# EAGLE board Control Board (EAGLE 7.7.0)
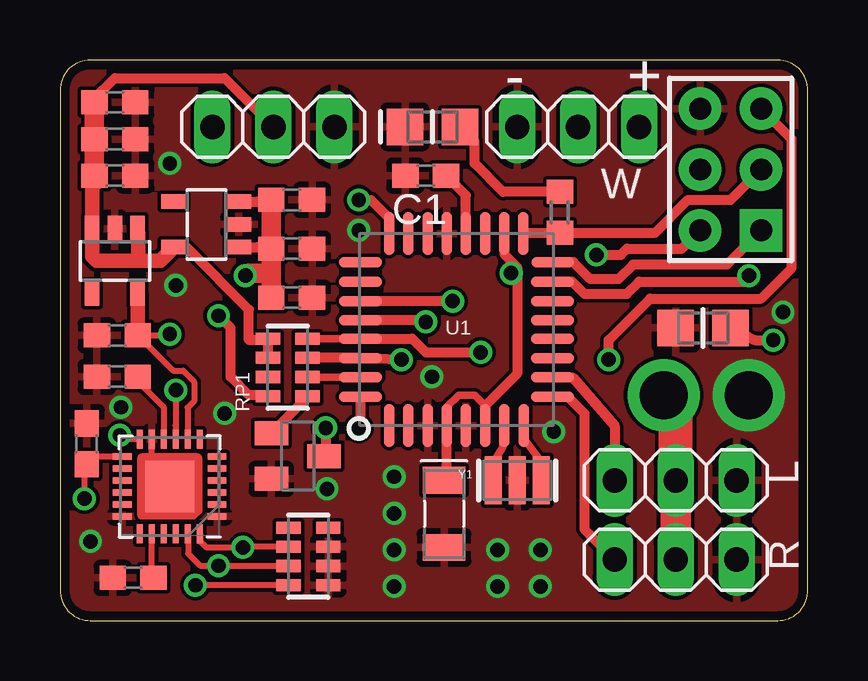
[diagram p0: board, top side]
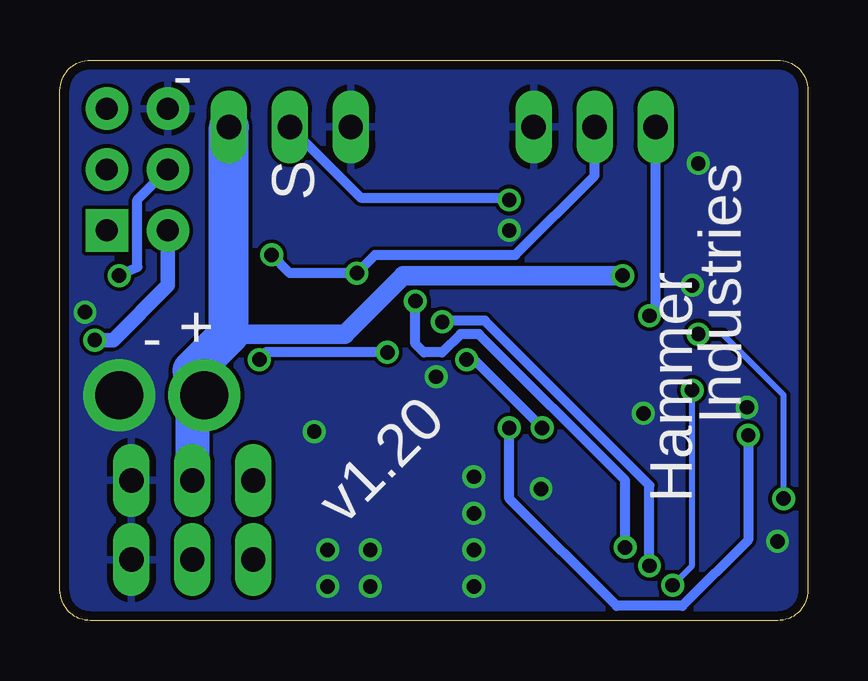
[diagram p1: board, bottom side, seen from below]

Size 31.17 x 23.36 mm. Coordinates in mm from the lower left corner, seen from the top.
Outline: 1.27,0 29.9,0 arc90 31.17,1.27 31.17,22.09 arc90 29.9,23.36 1.27,23.36 arc90 0,22.09 0,1.27 arc90 1.27,0
Copper layers (1*16): Top 0.0356mm / dielectric 1.5011mm / Bottom 0.0356mm
Design rules "oshpark-2layer *": minimum track width 6mil, minimum drill 13mil, track to track 6mil, track to pad 6mil, pad to pad 6mil, via to via 6mil, smd to smd 6mil, copper to edge 15mil, drill to drill 6mil, minimum pad ring 7mil, minimum via ring 7mil, stop-mask expansion 2.5mil, vias tented up to drill 25mil, thermal gap 10mil

## Footprints (pad centres in the part's own frame; a part is rotated, then mirrored left to right if it is on the bottom)
C0603 = smd 1.1 x 1: 1 -0.85,0; 2 0.85,0
TAN-A = smd 1.118 x 1.778: 1 0,0; 2 2.794,0
CAP0805-NP = smd 1.524 x 1.524: 1 0,0; 2 2.286,0
SOT23-5 = smd 0.6 x 1.05: 1 -0.95,-1.35; 2 0,-1.35; 3 0.95,-1.35; 4 0.95,1.35; 5 -0.95,1.35
QFN50P400X400X95-25T265X275N = smd 0.26 x 0.79: 1 -1.25,-1.97; 2 -0.75,-1.97; 3 -0.25,-1.97; 4 0.25,-1.97; 5 0.75,-1.97; 6 1.25,-1.97; 13 1.25,1.97; 14 0.75,1.97; 15 0.25,1.97; 16 -0.25,1.97; 17 -0.75,1.97; 18 -1.25,1.97 | smd 0.79 x 0.26: 7 1.97,-1.25; 8 1.97,-0.75; 9 1.97,-0.25; 10 1.97,0.25; 11 1.97,0.75; 12 1.97,1.25; 19 -1.97,1.25; 20 -1.97,0.75; 21 -1.97,0.25; 22 -1.97,-0.25; 23 -1.97,-0.75; 24 -1.97,-1.25 | smd 2.15 x 2.05: 25 0,0
HEAD3X2 = drill 0.914 pad 1.778 square: 1 0,0 | drill 0.914 pad 1.778: 2 0,2.54; 3 2.54,0; 4 2.54,2.54; 5 5.08,0; 6 5.08,2.54
1X03 = drill 1.016 long: 1 -2.54,0; 2 0,0; 3 2.54,0
LED0805 = smd 1.524 x 1.524: 1 0,0; 2 2.286,0
R0603 = smd 1 x 1.1: 1 -0.85,0; 2 0.85,0
RES4NT = smd 0.508 x 1.016: 1 0,0; 2 0.8,0; 3 1.6,0; 4 2.4,0; 5 2.4,1.651; 6 1.6,1.651; 7 0.8,1.651; 8 0,1.651
SOT23-BEC = smd 1 x 1.4: B -0.95,-1.1; C 0,1.1; E 0.95,-1.1
QFP032 = smd 0.432 x 1.778: 1 0,0; 2 0.8,0; 3 1.599,0; 4 2.399,0; 5 3.199,0; 6 3.998,0; 7 4.798,0; 8 5.598,0; 17 5.588,8.001; 18 4.798,7.997; 19 3.998,7.997; 20 3.199,7.997; 21 2.399,7.997; 22 1.599,7.997; 23 0.799,7.997; 24 0,7.997 | smd 1.778 x 0.432: 9 6.807,1.194; 10 6.807,2.007; 11 6.807,2.794; 12 6.807,3.607; 13 6.807,4.394; 14 6.807,5.182; 15 6.807,5.994; 16 6.816,6.803; 25 -1.194,6.807; 26 -1.194,5.994; 27 -1.194,5.182; 28 -1.194,4.394; 29 -1.194,3.607; 30 -1.194,2.794; 31 -1.194,2.007; 32 -1.194,1.194
RESONATOR = smd 0.7 x 2: 1 -1,0; 2 0,0; 3 1,0

## Placement (x,y rotation side)
C1  [C0603]  15.24,18.54 180 top
C2  4.7uF  [TAN-A]  16,5.84 270 top
C3  0.1uF  [CAP0805-NP]  27.94,12.19 180 top
C4  [C0603]  2.29,18.54 0 top
C5  [C0603]  9.65,15.49 0 top
C6  [C0603]  2.39,10.16 0 top
C7  [C0603]  2.39,11.89 180 top
C8  [C0603]  2.29,21.59 0 top
C9  [C0603]  1.12,7.37 90 top
C10  [C0603]  3.05,1.78 0 top
C11  [C0603]  9.65,17.53 0 top
C13  [C0603]  9.65,13.46 0 top
C14  [C0603]  2.29,20.07 0 top
IC1  TPS70916DBV  [SOT23-5]  6.1,16.51 90 top
IC2  MPU6050  [QFN50P400X400X95-25T265X275N]  4.57,5.59 90 top
IC3  TPS70916DBV  [SOT23-5]  2.29,14.99 180 top
J4  HEAD3X2  [HEAD3X2]  29.21,16.26 90 top
L  [1X03]  25.65,5.84 180 top
LED3  L_AMBER  [LED0805]  14.38,20.57 0 top
R  [1X03]  25.65,2.54 180 top
R1  1K  [R0603]  20.83,17.02 270 top
RP1  1K  [RES4NT]  10.31,9.35 90 top
RP2  4.7K  [RES4NT]  11.18,1.47 90 top
SBUS  [1X03]  8.89,20.57 180 top
T1  [SOT23-BEC]  9.91,6.86 270 top
U1  ATMEGA328  [QFP032]  13.72,8.13 0 top
W  [1X03]  21.59,20.57 0 top
Y1  16MHz  [RESONATOR]  19.05,5.84 0 top

## Library data of the parts
C1 C4-C11 C13 C14 R1 = resistor
C2 C3 LED3 RP1 RP2 U1 = MySMD
IC1 IC3 = tps709xx_10; MF: Texas Instruments; MPN: TPS70916DBVT; OC_FARNELL: 2314371; OC_NEWARK: 69W6893
IC2 = invensense
J4 = MyCON2
L R SBUS W = pinhead
T1 = transistor-neu-to92
Y1 = MySMD2

## Nets
+3V3: C7.1 C9.1 IC2.8 IC2.13 IC3.5
+5V: C2.1 C3.1 C4.1 C8.1 C14.1 IC1.5 IC3.1 IC3.3 J4.2 RP1.5 RP1.6 SBUS.2 U1.4 U1.6 U1.18
A0: U1.23
A1: U1.24 W.2
A2: U1.25
A3: U1.26
A4: IC2.24 RP2.6 U1.27
A5: IC2.23 RP2.7 U1.28
A6: U1.19
A7: U1.22
AREF: C1.1 U1.20
COM: C1.2 C2.2 C3.2 C4.2 C5.2 C6.1 C7.2 C8.2 C9.2 C10.1 C11.2 C13.2 C14.2 IC1.2 IC2.1 IC2.11 IC2.18 IC2.25 IC3.2 J4.6 L.1 LED3.1 R.1 RP2.1 RP2.2 RP2.3 SBUS.1 T1.E U1.3 U1.5 U1.21 W.1 Y1.2
D0/RX: RP1.3 T1.C U1.30
D1/TX: RP1.2 U1.31
D2: IC2.12 U1.32
D3: U1.1
D4: U1.2
D5: R.3 U1.9
D6: L.3 U1.10
D7: U1.11
D8: U1.12
D9: U1.13
D10: U1.14
D11/MOSI: J4.4 U1.15
D12/MISO: J4.1 U1.16
D13/SCK: J4.3 R1.2 U1.17
N$1: U1.8 Y1.3
N$2: U1.7 Y1.1
N$3: IC2.9 RP2.8
N$4: C6.2 IC2.10
N$5: RP1.1 T1.B
N$6: C10.2 IC2.20
N$7: LED3.2 R1.1
RESET: J4.5 RP1.4 U1.29
SBUS: RP1.8 SBUS.3
TX: RP1.7
VIN: C5.1 C11.1 C13.1 IC1.1 IC1.3 L.2 R.2 W.3

## Tracks (layer width: path | path; a pad name or v marks a point on that pad's centre or on a via)
+3V3  (via drill 0.6)
  Top 0.254: IC2.13 1.59,6.84 C9.1 1.02,6.41 v1.02,5.08 | IC2.8 5.32,8.88 5.59,9.14 5.59,9.96 5.13,10.41 4.71,10.41 C7.1 4.52,11.89 v4.57,11.94
  Top 0.61: IC3.5 C7.1
  Bottom 0.254: v1.02,5.08 1.02,9.4 3.56,11.94 v4.57,11.94
+5V  (via drill 0.6)
  Top 0.305: U1.6 17.71,8.96 17.27,9.4 16.61,9.4 16.1,8.89 16.1,7.88 U1.4
  Top 0.406: 16.1,7.88 16.1,6.3 16,5.79 C2.1 | C8.1 1.44,21.76 2.29,22.61 6.86,22.61 SBUS.2 | U1.18 18.51,15.27 19.05,14.73 | 19.05,14.73 19.05,10.29 17.71,8.96 | 19.05,14.73 v18.8,14.48 | RP1.6 RP1.5 8.6,11.68 7.87,11.68 7.87,12.95 5.33,15.49 4.81,15.49 IC1.5 4.57,15.23 | C3.1 28.96,11.68 v29.72,11.68 | v22.35,15.24 23.37,15.24 23.62,15.49 25.91,15.49 J4.2 | 1.53,18.54 1.53,18.27
  Top 0.61: 1.53,18.27 1.34,18.07 IC3.3 1.34,15.17 1.52,14.99 3.25,14.99 | 3.25,14.99 3.25,16.07 IC3.1 | 3.25,14.99 4.17,14.99 IC1.5
  Top 0.813: C8.1 C14.1 C4.1 1.53,18.54
  Bottom 0.406: v22.35,15.24 21.59,14.48 v18.8,14.48 18.03,15.24 12.19,15.24 8.89,18.54 SBUS.2
  Bottom 0.61: J4.2 26.67,13.97 28.96,11.68 v29.72,11.68
A1  (via drill 0.6)
  Top 0.406: v12.45,17.53 12.95,17.53 13.72,16.76 U1.24
  Bottom 0.406: W.2 18.64,17.63 12.55,17.63 v12.45,17.53
A4  (via drill 0.6)
  Top 0.254: IC2.24 5.84,3.6 5.84,3.3 6.1,3.05 v7.62,3.05 7.64,3.07 RP2.6
  Top 0.406: v16.36,13.31 U1.27
  Bottom 0.406: v16.36,13.31 16.36,11.53 16,11.18 15.24,11.18 14.48,11.94 13.72,11.94 7.62,5.84 v7.62,3.05
A5  (via drill 0.6)
  Top 0.254: IC2.23 5.33,3.61 5.33,2.79 5.84,2.29 v6.6,2.29 6.62,2.27 RP2.7
  Top 0.406: v15.24,12.45 15.16,12.52 U1.28
  Bottom 0.406: v15.24,12.45 15.19,12.5 13.46,12.5 6.6,5.64 v6.6,2.29
AREF
  Top 0.406: U1.20 16.92,17.72 C1.1
COM  (via drill 0.6, 2)
  Top 0.254: IC2.11 3.81,7.55 3.81,6.35 IC2.25
  other vias: 12.45,16.26 15.49,10.16 11.13,5.49 20.57,7.87 30.12,12.85 4.57,19.05 28.7,9.4 2.54,8.89 4.83,13.97 6.86,8.64 1.27,3.3 13.92,5.99 13.92,4.47 13.92,2.95 13.92,1.42 18.24,2.95 18.24,1.42 20.02,2.95 20.02,1.42
  pour Bottom: 32,24.13 0,24.38 0,0 32.26,0
  pour Top: 0,0 0,24.38 32.26,24.38 32.26,0
D0/RX  (via drill 0.6)
  Top 0.305: 12.5,10.95 U1.30
  Top 0.406: 12.5,10.95 RP1.3 | 10.92,6.6 T1.C 11.07,6.93 v11.07,8.03 | v14.22,10.87 U1.30
  Bottom 0.406: v11.07,8.03 13.97,10.92 v14.22,10.87
D1/TX
  Top 0.305: RP1.2 12.51,10.15 U1.31
D2  (via drill 0.6)
  Top 0.254: IC2.12 2.65,7.56 v2.49,7.72
  Top 0.406: v12.45,8.03 12.52,8.2 U1.32
  Bottom 0.406: v2.49,7.72 2.49,3.35 5.23,0.61 7.98,0.61 12.45,5.08 v12.45,8.03
D5
  Top 0.406: U1.9 21.16,9.32 21.84,8.64 21.84,3.81 R.3
D6
  Top 0.406: U1.10 21.36,10.13 23.11,8.13 L.3
D11/MOSI  (via drill 0.6)
  Top 0.406: U1.15 21.34,14.12 21.84,13.61 23.62,13.61 24.13,14.12 28.55,14.12 28.55,14.22 v28.7,14.38
  Bottom 0.406: v28.7,14.38 28.8,14.38 27.94,14.73 27.94,17.53 J4.4
D12/MISO
  Top 0.406: J4.1 27.79,14.83 23.88,14.83 23.27,14.22 22.1,14.22 21.39,14.94 U1.16
D13/SCK
  Top 0.406: U1.17 19.34,16.17 R1.2 24.8,16.17 26.16,17.53 27.94,17.53 J4.3
N$1
  Top 0.305: Y1.3 20.05,6.62 19.3,7.62 19.3,7.86 U1.8
N$2
  Top 0.305: Y1.1 18.05,6.57 18.44,7.21 18.44,7.8 U1.7
N$3  (via drill 0.6)
  Top 0.254: RP2.8 v5.64,1.47 | v4.83,9.6 4.82,8.12 IC2.9
  Bottom 0.254: v5.64,1.47 4.83,2.29 v4.83,9.6
N$4
  Top 0.254: C6.2 3.39,9.82 4.32,8.89 IC2.10
N$5
  Top 0.406: T1.B 10.31,9.31 RP1.1
N$6
  Top 0.254: C10.2 3.82,1.85 IC2.20
N$7
  Top 0.406: R1.1 18.45,17.87 17.27,19.05 17.27,19.96 LED3.2
RESET  (via drill 0.6)
  Top 0.305: RP1.4 12.51,11.75 U1.29
  Top 0.406: 12.51,11.75 14.67,11.75 15.24,11.18 v17.53,11.18 | v22.86,10.87 22.86,11.68 24.59,13.41 29.21,13.41 30.48,14.68 30.48,20.07 J4.5
  Bottom 0.406: v17.53,11.18 22.61,11.18 v22.86,10.87
SBUS  (via drill 0.6)
  Top 0.406: RP1.8 8.61,9.4 7.87,9.4 7.11,10.16 7.11,12.19 v6.6,12.7
  Bottom 0.406: SBUS.3 6.35,12.95 v6.6,12.7
VIN  (via drill 0.6, 2)
  Top 0.406: IC1.3 8.23,17.46 C11.1 | IC1.1 8.23,15.56 C5.1
  Top 0.813: C11.1 C5.1 8.8,14.48 | v7.72,14.38 7.87,14.48 8.8,14.48 | 8.8,14.48 C13.1
  Top 1.27: R.2 L.2
  Top 1.422: L.2 25.65,8.89
  Bottom 0.813: 24.13,11.94 19.3,11.94 16.87,14.38 v7.72,14.38
  Bottom 1.27: 25.65,10.41 25.15,9.91 v25.15,9.4
  Bottom 1.422: v25.15,9.4 25.65,8.89 L.2
  Bottom 1.676: 25.65,10.41 24.13,11.94 W.3

## Text on the board
bPlace: - | Industries | Hammer | + | - | v1.20
tNames: - | +
bNames: S
Document: - | + | S | + | -